# EAGLE board attenuverter2 (EAGLE 7.5.0)

Size 101.27 x 85.08 mm. Coordinates in mm from the lower left corner, seen from the top.
Outline: 1.27,0 101.27,0 100,85.08 0,85.08 1.27,0
Copper layers (1*16): Top 0.035mm / dielectric 1.5mm / Bottom 0.035mm
Design rules "default": minimum track width 10mil, minimum drill 24mil, track to track 8mil, track to pad 8mil, pad to pad 8mil, via to via 8mil, smd to smd 8mil, copper to edge 40mil, drill to drill 8mil, minimum pad ring 10mil, minimum via ring 8mil, stop-mask expansion 4mil, vias tented up to drill 0mil, thermal gap 10mil

## Footprints (pad centres in the part's own frame; a part is rotated, then mirrored left to right if it is on the bottom)
C050-055X075 = drill 0.813 octagon: 1 -2.54,0; 2 2.54,0
E2,5-6 = drill 0.813 pad 1.6: + -1.27,0 | drill 0.813 pad 1.6 octagon: - 1.27,0
DO41-4 = drill 0.9: A 5.08,0 | drill 0.9 square: C -5.08,0
BOURNS-MF-R = drill 0.9: P$1 -5.105,0; P$2 5.105,0
WQP-PJ301M-12_JACK = drill 1.1: P$1_TIP 0,5; P$2_SWITCH 0,-3.5; P$3_SLEEVE 0,-6.5
0207/7 = drill 0.813 octagon: 1 -3.81,0; 2 3.81,0
EURO_PWR_HEADER_LOCK = drill 1.016 pad 1.88 octagon: GND1 -2.54,1.143; GND2 -2.54,-1.397; GND3 0,1.397; GND4 0,-1.143; GND5 2.54,1.143; GND6 2.54,-1.397; NEG1 -5.08,1.397; NEG2 -5.08,-1.143; POS1 5.08,1.397; POS2 5.08,-1.143
DIL14 = drill 0.813 long: 1 -7.62,-3.81; 2 -5.08,-3.81; 3 -2.54,-3.81; 4 0,-3.81; 5 2.54,-3.81; 6 5.08,-3.81; 7 7.62,-3.81; 8 7.62,3.81; 9 5.08,3.81; 10 2.54,3.81; 11 0,3.81; 12 -2.54,3.81; 13 -5.08,3.81; 14 -7.62,3.81
9MM_SNAP-IN_POT = drill 1.1 square: 1 -2.5,-7 | drill 1.1 octagon: 2 0,-7; 3 2.5,-7 | drill 2.1 square: CHASSIS1 -4.5,0; CHASSIS2 4.5,0

## Placement (x,y rotation side)
C1  100nF  [C050-055X075]  12.7,29.21 0 bottom
C2  100nF  [C050-055X075]  17.78,39.37 270 bottom
C3  100nF  [C050-055X075]  6.35,44.45 0 bottom
C4  100nF  [C050-055X075]  13.97,52.07 0 bottom
C5  100nF  [C050-055X075]  5.08,52.07 0 bottom
C6  100nF  [C050-055X075]  13.97,58.42 0 bottom
C7  10uF  [E2,5-6]  10.16,15.24 180 bottom
C8  10uF  [E2,5-6]  10.16,21.59 180 bottom
C9  100nF  [C050-055X075]  5.08,58.42 0 bottom
C10  100nF  [C050-055X075]  5.08,27.94 90 bottom
D1  1N4007  [DO41-4]  7.62,34.29 0 top
D2  1N4007  [DO41-4]  7.62,38.1 180 top
F1  MF-R500+  [BOURNS-MF-R]  5.08,13.97 90 bottom
F2  MF-R500+  [BOURNS-MF-R]  15.24,13.97 90 bottom
IN1  THONKICONNNEW  [WQP-PJ301M-12_JACK]  26.67,69.85 0 top
IN2  THONKICONNNEW  [WQP-PJ301M-12_JACK]  26.67,57.15 0 top
IN3  THONKICONNNEW  [WQP-PJ301M-12_JACK]  26.67,44.45 0 top
IN4  THONKICONNNEW  [WQP-PJ301M-12_JACK]  26.67,31.75 0 top
OUT1  THONKICONNNEW  [WQP-PJ301M-12_JACK]  93.98,73.66 0 top
OUT2  THONKICONNNEW  [WQP-PJ301M-12_JACK]  93.98,57.15 0 top
OUT3  THONKICONNNEW  [WQP-PJ301M-12_JACK]  93.98,43.18 0 top
OUT4  THONKICONNNEW  [WQP-PJ301M-12_JACK]  93.98,29.21 0 top
R1  10k  [0207/7]  83.82,1.27 0 top
R2  10k  [0207/7]  43.18,11.43 270 top
R3  4.7k  [0207/7]  35.56,7.62 0 top
R4  10k  [0207/7]  43.18,20.32 90 top
R5  10k  [0207/7]  58.42,20.32 90 top
R6  10k  [0207/7]  58.42,11.43 90 top
R7  4.7k  [0207/7]  50.8,7.62 0 top
R8  10k  [0207/7]  36.83,2.54 0 top
R9  10k  [0207/7]  86.36,3.81 0 top
R10  10k  [0207/7]  73.66,24.13 90 top
R11  4.7k  [0207/7]  66.04,7.62 0 top
R12  10k  [0207/7]  80.01,0 0 top
R13  10k  [0207/7]  64.77,2.54 180 top
R14  10k  [0207/7]  77.47,6.35 0 top
R15  4.7k  [0207/7]  81.28,7.62 0 top
R16  10k  [0207/7]  52.07,2.54 0 top
R17  10k  [0207/7]  62.23,81.28 0 top
R18  10k  [0207/7]  53.34,81.28 0 top
R19  10k  [0207/7]  43.18,81.28 0 top
R20  10k  [0207/7]  33.02,81.28 0 top
R21  10k  [0207/7]  29.21,78.74 0 top
R22  10k  [0207/7]  24.13,81.28 0 top
R23  10k  [0207/7]  21.59,78.74 0 top
R24  10k  [0207/7]  17.78,73.66 0 top
R25  10k  [0207/7]  17.78,69.85 0 top
R26  10k  [0207/7]  16.51,66.04 0 top
R27  10k  [0207/7]  10.16,78.74 0 top
R28  10k  [0207/7]  7.62,74.93 0 top
R29  10k  [0207/7]  10.16,67.31 0 top
R30  10k  [0207/7]  8.89,63.5 0 top
R31  10k  [0207/7]  10.16,71.12 0 top
R32  10k  [0207/7]  8.89,77.47 0 top
R33  10k  [0207/7]  3.81,67.31 90 top
R34  10k  [0207/7]  92.71,81.28 0 top
R35  10k  [0207/7]  82.55,81.28 0 top
R36  10k  [0207/7]  72.39,81.28 0 top
SV1  EURO_POWER_HEADERLOCK_PADS  [EURO_PWR_HEADER_LOCK]  10.16,3.81 0 bottom
U1  TL074_  [DIL14]  95.25,8.89 270 bottom
U2  TL074_  [DIL14]  24.13,12.7 270 bottom
VR1  B10k  [9MM_SNAP-IN_POT]  35.56,17.78 0 top
VR2  B10k  [9MM_SNAP-IN_POT]  50.8,17.78 0 top
VR3  B10k  [9MM_SNAP-IN_POT]  66.04,17.78 0 top
VR4  B10k  [9MM_SNAP-IN_POT]  81.28,17.78 0 top
VR5  B10k  [9MM_SNAP-IN_POT]  39.37,74.93 0 top
VR6  B10k  [9MM_SNAP-IN_POT]  39.37,60.96 0 top
VR7  B10k  [9MM_SNAP-IN_POT]  39.37,46.99 0 top
VR8  B10k  [9MM_SNAP-IN_POT]  39.37,33.02 0 top
VR9  B10k  [9MM_SNAP-IN_POT]  53.34,74.93 0 top
VR10  B10k  [9MM_SNAP-IN_POT]  53.34,60.96 0 top
VR11  B10k  [9MM_SNAP-IN_POT]  53.34,46.99 0 top
VR12  B10k  [9MM_SNAP-IN_POT]  53.34,33.02 0 top
VR13  B10k  [9MM_SNAP-IN_POT]  67.31,74.93 0 top
VR14  B10k  [9MM_SNAP-IN_POT]  67.31,60.96 0 top
VR15  B10k  [9MM_SNAP-IN_POT]  67.31,46.99 0 top
VR16  B10k  [9MM_SNAP-IN_POT]  67.31,33.02 0 top
VR17  B10k  [9MM_SNAP-IN_POT]  81.28,74.93 0 top
VR18  B10k  [9MM_SNAP-IN_POT]  81.28,60.96 0 top
VR19  B10k  [9MM_SNAP-IN_POT]  81.28,46.99 0 top
VR20  B10k  [9MM_SNAP-IN_POT]  81.28,33.02 0 top

## Library data of the parts
C1-C10 R1-R36 = resistor
D1 D2 = gm-diodes
F1 F2 = ptc-littlefuse
IN1-IN4 OUT1-OUT4 SV1 U1 U2 VR1-VR20 = MusicThingModular

## Nets
+12V: C1.1 C3.1 C5.1 C7.+ C9.1 D1.C F1.P$2 U1.4 U2.4
-12V: C2.2 C4.2 C6.2 C8.- C10.2 D2.A F2.P$1 U1.11 U2.11
GND: C1.2 C2.1 C3.2 C4.1 C5.2 C6.1 C7.- C8.+ C9.2 C10.1 D1.A D2.C IN1.P$3_SLEEVE IN2.P$3_SLEEVE IN3.P$3_SLEEVE IN4.P$3_SLEEVE OUT1.P$3_SLEEVE OUT2.P$3_SLEEVE OUT3.P$3_SLEEVE OUT4.P$3_SLEEVE SV1.GND1 SV1.GND2 SV1.GND3 SV1.GND4 SV1.GND5 SV1.GND6 U2.3 U2.6 U2.9 U2.13 VR1.2 VR2.2 VR3.2 VR4.2 VR5.1 VR6.1 VR7.1 VR8.1 VR9.1 VR10.1 VR11.1 VR12.1 VR13.1 VR14.1 VR15.1 VR16.1 VR17.1 VR18.1 VR19.1 VR20.1
N$1: R1.1 R2.2 R3.2 U1.3
N$2: R2.1 R4.1 R19.2 U2.1
N$3: R4.2 U1.2 VR1.3
N$4: R3.1 VR1.1
N$5: R22.2 R23.1 R24.2 R25.2 R26.2 U2.5
N$6: R5.1 R6.2 R7.2 U1.5
N$7: OUT1.P$1_TIP R1.2 U1.1
N$8: R8.2 U1.6 VR2.3
N$9: F1.P$1 SV1.POS1 SV1.POS2
N$10: F2.P$2 SV1.NEG1 SV1.NEG2
N$11: R7.1 VR2.1
N$12: OUT2.P$1_TIP R5.2 U1.7
N$13: R22.1 VR9.2
N$14: R9.1 R10.2 R11.2 U1.10
N$15: R12.2 U1.9 VR3.3
N$16: R11.1 VR3.1
N$17: OUT3.P$1_TIP R9.2 U1.8
N$18: IN4.P$1_TIP VR8.3 VR12.3 VR16.3 VR20.3
N$19: R13.1 R14.2 R15.2 U1.12
N$20: R16.2 U1.13 VR4.3
N$21: R15.1 VR4.1
N$22: OUT4.P$1_TIP R13.2 U1.14
N$23: IN2.P$1_TIP VR6.3 VR10.3 VR14.3 VR18.3
N$24: R17.2 R18.2 R19.1 R20.2 R21.2 U2.2
N$26: R18.1 VR5.2
N$27: R17.1 VR6.2
N$28: IN3.P$1_TIP VR7.3 VR11.3 VR15.3 VR19.3
N$29: R20.1 VR7.2
N$31: R21.1 VR8.2
N$32: R24.1 VR10.2
N$34: R25.1 VR11.2
N$36: R26.1 VR12.2
N$38: IN1.P$1_TIP VR5.3 VR9.3 VR13.3 VR17.3
N$39: R6.1 R8.1 R23.2 U2.7
N$40: R27.2 R28.1 R29.2 R30.2 R31.2 U2.10
N$41: R27.1 VR13.2
N$43: R29.1 VR14.2
N$45: R30.1 VR15.2
N$47: R31.1 VR16.2
N$48: R10.1 R12.1 R28.2 U2.8
N$49: R32.2 R33.1 R34.2 R35.2 R36.2 U2.12
N$50: R32.1 VR17.2
N$52: R34.1 VR18.2
N$54: R35.1 VR19.2
N$56: R36.1 VR20.2
N$57: R14.1 R16.1 R33.2 U2.14

## Tracks (layer width: path | path; a pad name or v marks a point on that pad's centre or on a via)
+12V  (8 unrouted)
-12V  (8 unrouted)
GND  (49 unrouted)
N$1  (3 unrouted)
N$2  (3 unrouted)
N$3  (2 unrouted)
N$4  (1 unrouted)
N$5  (5 unrouted)
N$6  (3 unrouted)
N$7  (2 unrouted)
N$8  (2 unrouted)
N$9  (2 unrouted)
N$10  (2 unrouted)
N$11  (1 unrouted)
N$12  (2 unrouted)
N$13  (1 unrouted)
N$14  (3 unrouted)
N$15  (2 unrouted)
N$16  (1 unrouted)
N$17  (2 unrouted)
N$18  (4 unrouted)
N$19  (3 unrouted)
N$20  (2 unrouted)
N$21  (1 unrouted)
N$22  (2 unrouted)
N$23  (4 unrouted)
N$24  (5 unrouted)
N$26  (1 unrouted)
N$27  (1 unrouted)
N$28  (4 unrouted)
N$29  (1 unrouted)
N$31  (1 unrouted)
N$32  (1 unrouted)
N$34  (1 unrouted)
N$36  (1 unrouted)
N$38  (4 unrouted)
N$39  (3 unrouted)
N$40  (5 unrouted)
N$41  (1 unrouted)
N$43  (1 unrouted)
N$45  (1 unrouted)
N$47  (1 unrouted)
N$48  (3 unrouted)
N$49  (5 unrouted)
N$50  (1 unrouted)
N$52  (1 unrouted)
N$54  (1 unrouted)
N$56  (1 unrouted)
N$57  (3 unrouted)